# Altium PCB GuitarPreamp1.PcbDoc
Units mil, origin at the board's own origin, x right, y up, seen from the top; angles counter-clockwise.
Board outline 915 x 455 mil, 2 copper layers (Component Side, Solder Side); 13 components, 6 nets, 26 pads, 0 vias.
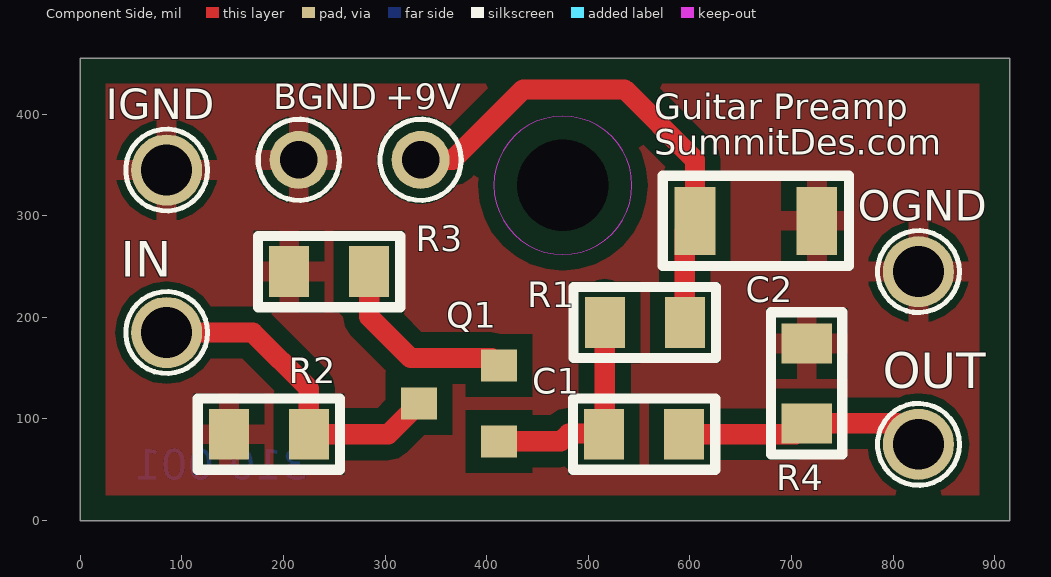
[diagram p0: Component Side view]
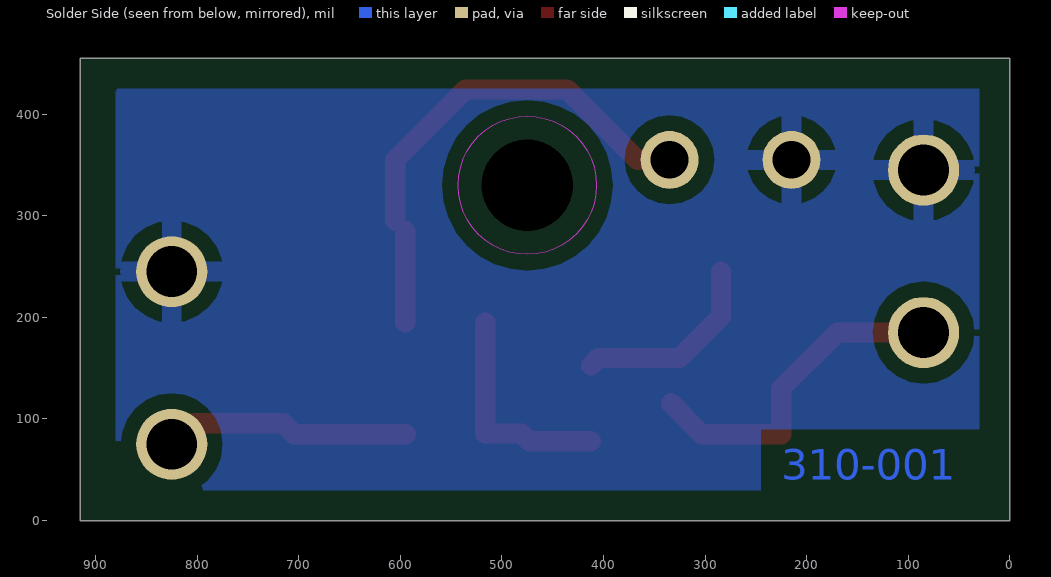
[diagram p1: Solder Side view, seen from below]
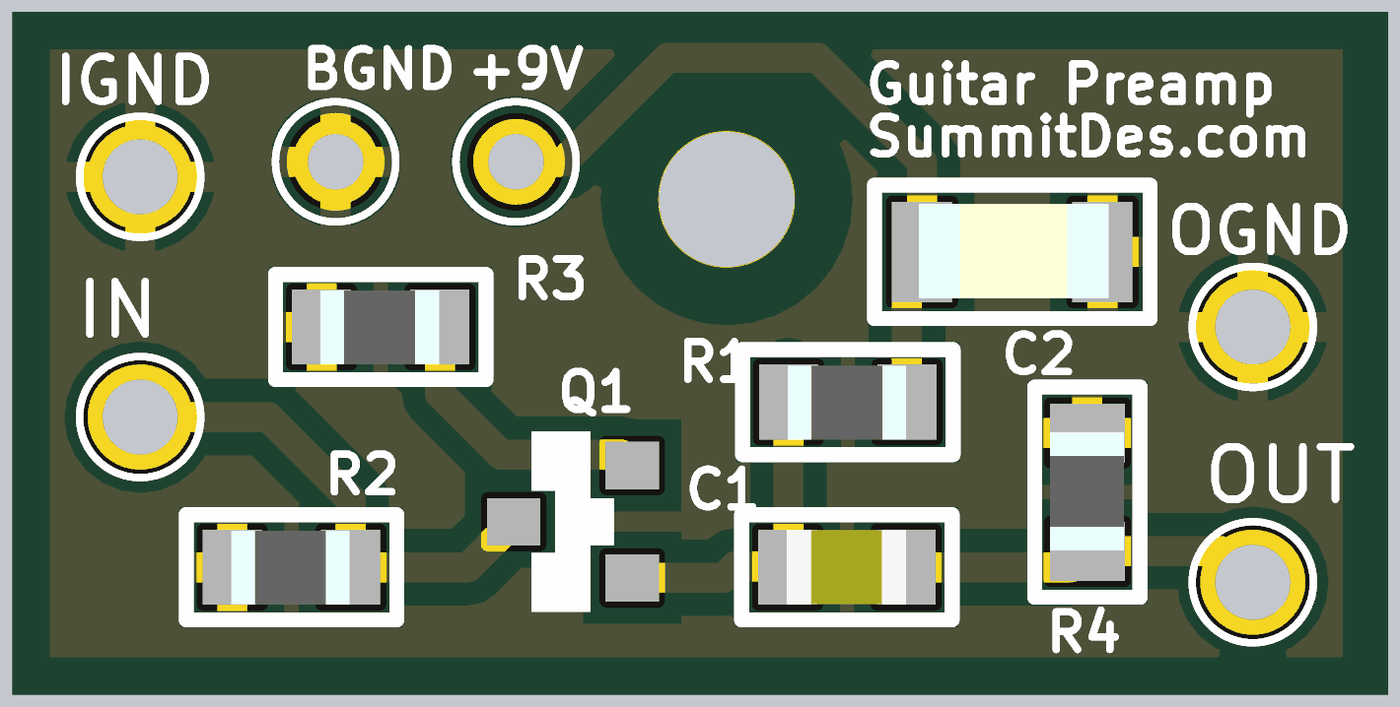
[diagram p2: 3D render of the assembled board from above, using the file's embedded part models]

## Layer stack, top to bottom
Component Side: signal copper 1.4
Dielectric: core 12.6, FR-4, Dk 4.8
Solder Side: signal copper 1.4

## Board outline
0,0 915,0 915,455 0,455

## Design rules (kind name [scope] priority, off if disabled: settings)
Clearance [All] p1: gap=15
MinimumAnnularRing [All] p1: minimumring=7
PlaneConnect [All] p1: planeconnectstyle=Relief reliefexpansion=20 reliefentries=4 reliefconductorwidth=20 reliefairgap=20
PolygonConnect [All] p1: connectstyle=Relief reliefconductorwidth=20 reliefentries=4 polygonreliefangle="90 Angle"
RoutingVias [All] p1: holewidth=28 width=50 viastyle="Through Hole" minholewidth=28 minwidth=50 maxholewidth=28 maxwidth=50
SilkToSilkClearance [All] p1: silktosilkclearance=0
SilkscreenOverComponentPads [All] p1: minsilkscreentomaskgap=1
SolderMaskExpansion [All] p1: expansion=4
Width [All] p1: maxlimit=40 minlimit=20 preferedwidth=20
25 further rules are at their usual default settings.

## Components (designator, comment, footprint, x,y, rotation, side; value= is the part's Value field where it differs from the comment)
+9V "" PTH_037 335,355 r90 top (schematic designator J1)
BGND "" PTH_037 215,355 r90 top (schematic designator J2)
C1 "" 0805C 555,85 r0 top
C2 "" 1206C 665,295 r0 top
IGND "" PTH_050 85,345 r90 top (schematic designator J6)
IN "" PTH_050 85,185 r90 top (schematic designator J4)
OGND "" PTH_050 825,245 r90 top (schematic designator J5)
OUT "" PTH_050 825,75 r90 top (schematic designator J3)
Q1 "" SOT23-3-A 372.87,115.35 r90 top
R1 "" 0805R 555.63,195 r0 top
R2 "" 0805R 185.63,85 r0 top
R3 "" 0805R 245,245 r0 top
R4 "" 0805R 715,135 r270 top

## Footprints (in the part's own frame and the unit in brackets; to place one, negate y for a bottom-side part, rotate by r counter-clockwise, add the part's x,y. Pads: shape width x height; smd on the part's side, far side on the other; paste and mask are expansions set on the pad)
0805C [mm]
  rect 1x1.27 smd: 1(-1,0) 2(1,0)
  silkscreen extent -1.78,-0.89 1.78,0.89, body extent -1.02,-0.64 1,0.64, height 0.61
0805R [mm]
  rect 1x1.27 smd: 1(-1,0) 2(1,0)
  silkscreen extent -1.78,-0.89 1.78,0.89, body extent -1.02,-0.64 0.98,0.62, height 0.6
1206C [mil]
  rect 40x66.93 smd: 1(-60,0) 2(60,0)
  silkscreen extent -92,-44 92,44, body extent -62,-31 64,32, height 33
PTH_037 [mil]
  round 57 hole 37: 1(0,0)
  silkscreen extent -40,-40 40,40
PTH_050 [mil]
  round 70 hole 50: 1(0,0)
  silkscreen extent -40,-40 40,40
SOT23-3-A [mm]
  rect 0.8x0.9 smd: D(-0.95,-1) G(0,1) S(0.95,-1)
  rect 1x1 on Top Overlay: ""(-1.025,0.2) ""(1.025,0.2)
  rect 1.05x0.6 on Top Overlay: ""(0,0)
  rect 0.8x1 on Top Overlay: ""(0,-0.2)
  body extent -1.52,-1.4 1.48,1.1, height 0.76

## Part data
+9V BGND: library part 250-002, "PTH .037\""
C1: library part 200-003, "4.7UF 16V Y5V 0805"
C2: library part 200-002, "10UF 16V Y5V 1206"
IGND IN OGND OUT: library part 250-003, "PTH .050\""
Q1: library part NFET, "IC SWITCH N-CH 40V 50MA SOT-23"
R1: library part 6.81K, "RES 6.81K OHM 1/8W 1% 0805"
R2: library part 3.0M, "RES 3.0M OHM 1/8W 5% 0805"
R3: library part 2.21K, "RES 2.21K OHM 1/8W 1% 0805"
R4: library part 51.1K, "RES 51.1K OHM 1/8W 1% 0805"

## Free pads (board coordinates)
  round 0 hole 90: ""(475,330)

## Nets (pads, with @x,y where several pads share a name; then routed paths per layer and width w, separated by ;. In a path a pad name is that pad's centre, name@x,y a point inside that pad or via, vN(x,y) a via of type N, cw(c..) or ccw(c..) an arc to the next point about the centre after c; other vN are vias at no path point)
GND: BGND.1 C2.2 IGND.1 OGND.1 R2.1 R3.1 R4.1
INPUT: IN.1 Q1.G R2.2 | length 328.9
  Component Side w20: IN.1 170,185 225,130 R2.2 303.15,85 Q1.G
NetQ1_S: Q1.S R3.2 | length 192.1
  Component Side w20: R3.2 284.37,200.63 325,160 405,160 Q1.S
OUTPUT: C1.2 OUT.1 R4.2 | length 243.6
  Component Side w20: C1.2 704.37,85 R4.2 804.37,95.63 OUT.1
PREAMPOUT: C1.1 Q1.D R1.1 | length 216.6
  Component Side w20: Q1.D 472.95,77.95 480.63,85.63 516.26,85.63 R1.1
VCC: +9V.1 C2.1 R1.2 | length 477.4
  Component Side w20: +9V.1 366.62,355 435.93,424.31 535.69,424.31 605,355 C2.1 ; R1.2 C2.1@595,285
pads on no net: Q1.

## Polygon pours and split planes (outlines as drawn)
GND on Component Side "Component Side-No Net" (solid, pour order 1000): 25,25 25,430 885,430 885,25 25,25
GND on Solder Side "Component Side-No Net" (solid, pour order 1000): 30,30 30,425 885,425 880,420 880,30 30,30

## Keep-outs
Keep-Out Layer:
  circle w1: c475,330 r68.01

## Other copper
Solder Side:
  text "310-001" at 225,40 h30

## Silkscreen, mask and mechanical layers (free items; w line width, h text height)
Top Overlay:
  text "Guitar Preamp" at 565,395 h25
  text "SummitDes.com" at 565,360 h25
Board Oulint M3:
  the board outline again, w3
Mechanical 16:
  lines w5: -3050,-2089 -2850,-2089 ; -3050,-217 -2850,-217 ; -3050,1663 -2850,1663 ; -674,-3965 -674,-3765 ; -674,3335 -674,3535 ; 1698,-3965 1698,-3765 ; 1698,3335 1698,3535 ; 1750,-3465 6250,-3465 ; 1750,-3165 6250,-3165 ; 1750,-2865 3250,-2865 ; 3250,-3765 3250,-3165 3250,-2565 ; 3710,-2214 3910,-2214 ; 4075,-3965 4075,-3765 ; 4075,3335 4075,3535 ; 5350,-3765 5350,-3165 ; 6250,-217 6450,-217 ; 6250,1663 6450,1663 ; 1750,-3765 350,-3765 350,-2565 1750,-2565 ; 1750,-3765 6250,-3765 ; 1750,-3765 1750,-2565 ; 1750,-2565 3250,-2565 ; 3250,-2565 6250,-2565 6250,-3765 ; 6250,-3765 6250,3335 -2850,3335 -2850,-3765 6250,-3765 ; -3050,-3965 6450,-3965 6450,3535 -3050,3535 -3050,-3965
  lines w10: -85.66,514.78 -65,455 ; -79.34,-60.22 -60,0 ; -75,454.89 -55,455.11 ; -70,-0.11 -50,0.11 ; -66.1,554.99 -65,455 ; -58.9,-99.99 -60,0 ; -45.66,515.22 -65,455 ; -39.34,-59.78 -60,0 ; -0.11,-110 0.11,-90 ; 59.78,-120.65 0,-100 ; 60.22,-80.66 0,-100 ; 96.63,-101.06 0,-100 ; 818.37,-108.94 915,-110 ; 854.78,-129.34 915,-110 ; 855.22,-89.35 915,-110 ; 914.89,-120 915.11,-100 ; 3236,-1806 5436,-1806 ; 3236,-1781 5436,-1781 ; 3241,-1966 5441,-1966 ; 3241,-1941 5441,-1941
  text "1" at -1877.66,3400 h70
  text "2" at 480.35,3400 h70
  text "3" at 2857,3400 h70
  text "4" at 5232.35,3400 h70
  text "FABRICATION NOTES" at 1940,2784 h90
  text "1) BOARD MATERIAL: FR-4" at 2015,2634 h60
  text "A" at -2975,2510 h70
  text "A" at 6320,2510 h70
  text "2) SURFACE FINISH: ENIG" at 2015,2484 h60
  text "3) BOARD THICKNESS: 0.062\" +/-10%" at 2015,2359 h60
  text "4) COPPER WEIGHT FOR ALL LAYERS AS SHOWN BELOW" at 2015,2234 h60
  text "Top and Bottom Layers - 1oz Copper" at 2240,2103 h60
  text "Internal Layers - 1/2oz Copper (if applicable)" at 2251,1985 h60
  text "5) UL FLAMABILITY RATING: 94V-0 MINIMUM" at 1971,1848 h60
  text "6) HOLE AND SLOT TOLERANCE AFTER PLATING: +/-0.005\"" at 1971,1723 h60
  text "HOLE UNDER 7MIL TOLERANCE: +0.003/-HOLE SIZE" at 2146,1598 h60
  text "HOLES AND SLOTS SHOW FINISHED SIZES (AFTER PLATING)" at 2146,1473 h60
  text "7) SOLDERMASK: LPI GREEN, BOTH SIDES" at 1971,1373 h60
  text "8) SILKSCREEN: WHITE NON-CONDUCTIVE EPOXY, BOTH SIDES" at 1971,1248 h60
  text "9) VENDOR TO MARK EIA 4-DIGIT DATE CODE," at 1971,1123 h60
  text "VENDOR LOGO, AND UL FLAMABILITY CODE" at 2146,998 h60
  text "ON PRIMARY SIDE, USING NON-CONDUCTIVE INK." at 2146,873 h60
  text "10) 100% CONTINUITY TESTING SHALL BE PERFORMED," at 1971,773 h60
  text "VENDOR TO IDENTIFY TEST PASSED ON PRIMARY SIDE," at 2196,673 h60
  text "B" at -2975,634 h70
  text "B" at 6320,634 h70
  text "455.027 (mil)" at -210.36,581.78 h60 r270.63
  text "USING NON-CONDUCTIVE INK." at 2196,548 h60
  text "11) THIS SINGLE BOARD MAY BE PALLETIZED FOR EASE OF" at 1971,448 h60
  text "MANUFACTURE, AFTER SINGLE BOARD REMOVAL, REMAINING" at 2196,323 h60
  text "BREAKAWAY FEATURES MUST BE FLUSH WITH BOARD GEOMETRY," at 2196,198 h60
  text "AND MUST CLEAR CIRCUITRY BY 0.030\"." at 2196,73 h60
  text "12) THIEVING IS ACCEPTABLE ON ALL COPPER LAYERS" at 1971,-27 h60
  text "915.055 (mil)" at 106.24,-137.15 h60 r359.37
  text "OF BREAKAWAY MATERIAL ONLY. VENDORS MAY USE" at 2196,-152 h60
  text "WHATEVER PATTERNS BEST SUITE THEIR PROCESS." at 2196,-252 h60
  text "13) DIMENSIONAL TOLERANCES: +/-0.005\"" at 1971,-377 h60
  text "14) ROHS COMPLIANT" at 1971,-527 h60
  text "15) Inspect to IPC 6012 Class 2" at 1971,-652 h60
  text "NOTE: Filled vias: NONE" at 2215,-850 h60
  text "Inspect to IPC-D-356 Netlist" at 2230,-1000 h60
  text "C" at -2975,-1242 h70
  text "Top Overlay" at 4036,-1656 h60
  text "Top Layer (1 oz) -->" at 1916,-1821 h60
  text "C" at 3775,-1832 h70
  text "<-- FR4" at 5431,-1871 h60
  text "Bottom Layer (1 oz) -->" at 1781,-1976 h60
  text "Bottom Overlay" at 3966,-2141 h60
  text "Board Stackup" at 3746,-2441 h100
  text "ENGINEER:" at 1800,-2665 h45
  text "TITLE:" at 3300,-2665 h45
  text "Summit Design" at 520,-2875 h100
  text "Guitar Preamp #1" at 3795,-2910 h80
  text "PCB DESIGNER:" at 1800,-2960 h45
  text "Services" at 515,-3010 h100
  text "D" at -2975,-3114 h70
  text "D" at 6320,-3114 h70
  text "DATE:" at 1800,-3265 h45
  text "PART NO.:" at 3300,-3265 h45
  text "REV:" at 5400,-3265 h45
  text "1" at 5535,-3380 h80
  text ".PRINT_DATE" at 1850,-3385 h70
  text "235 Camp Dixie Rd" at 500,-3465 h70
  text "Pascoag, RI 02859" at 500,-3565 h70
  text "FILE NAME:" at 1800,-3565 h45
  text "DWG NO:" at 3300,-3565 h45
  text "SCALE:" at 5400,-3565 h45
  text "310-001" at 3710,-3660 h80
  text "www.summitdes.com" at 500,-3665 h70
  text "1:1" at 5610,-3675 h60
  text ".PCB_FILE_NAME_NO_PATH" at 1850,-3685 h70
  text "1" at -1877.66,-3900 h70
  text "2" at 480.35,-3900 h70
  text "4" at 5232.35,-3900 h70
  text "1" at 5760,-3920 h80
Drill Drawing:
  text ".legend" at -2300,2484 h60